# Altium PCB КПБТ.758724.006_v2.PcbDoc
Units mm, origin at the board's own origin, x right, y up, seen from the top; angles counter-clockwise.
Board outline 70 x 80 mm, 2 copper layers (Top Layer, Top, Bottom Layer, Bottom); 124 components, 71 nets, 354 pads, 52 vias.
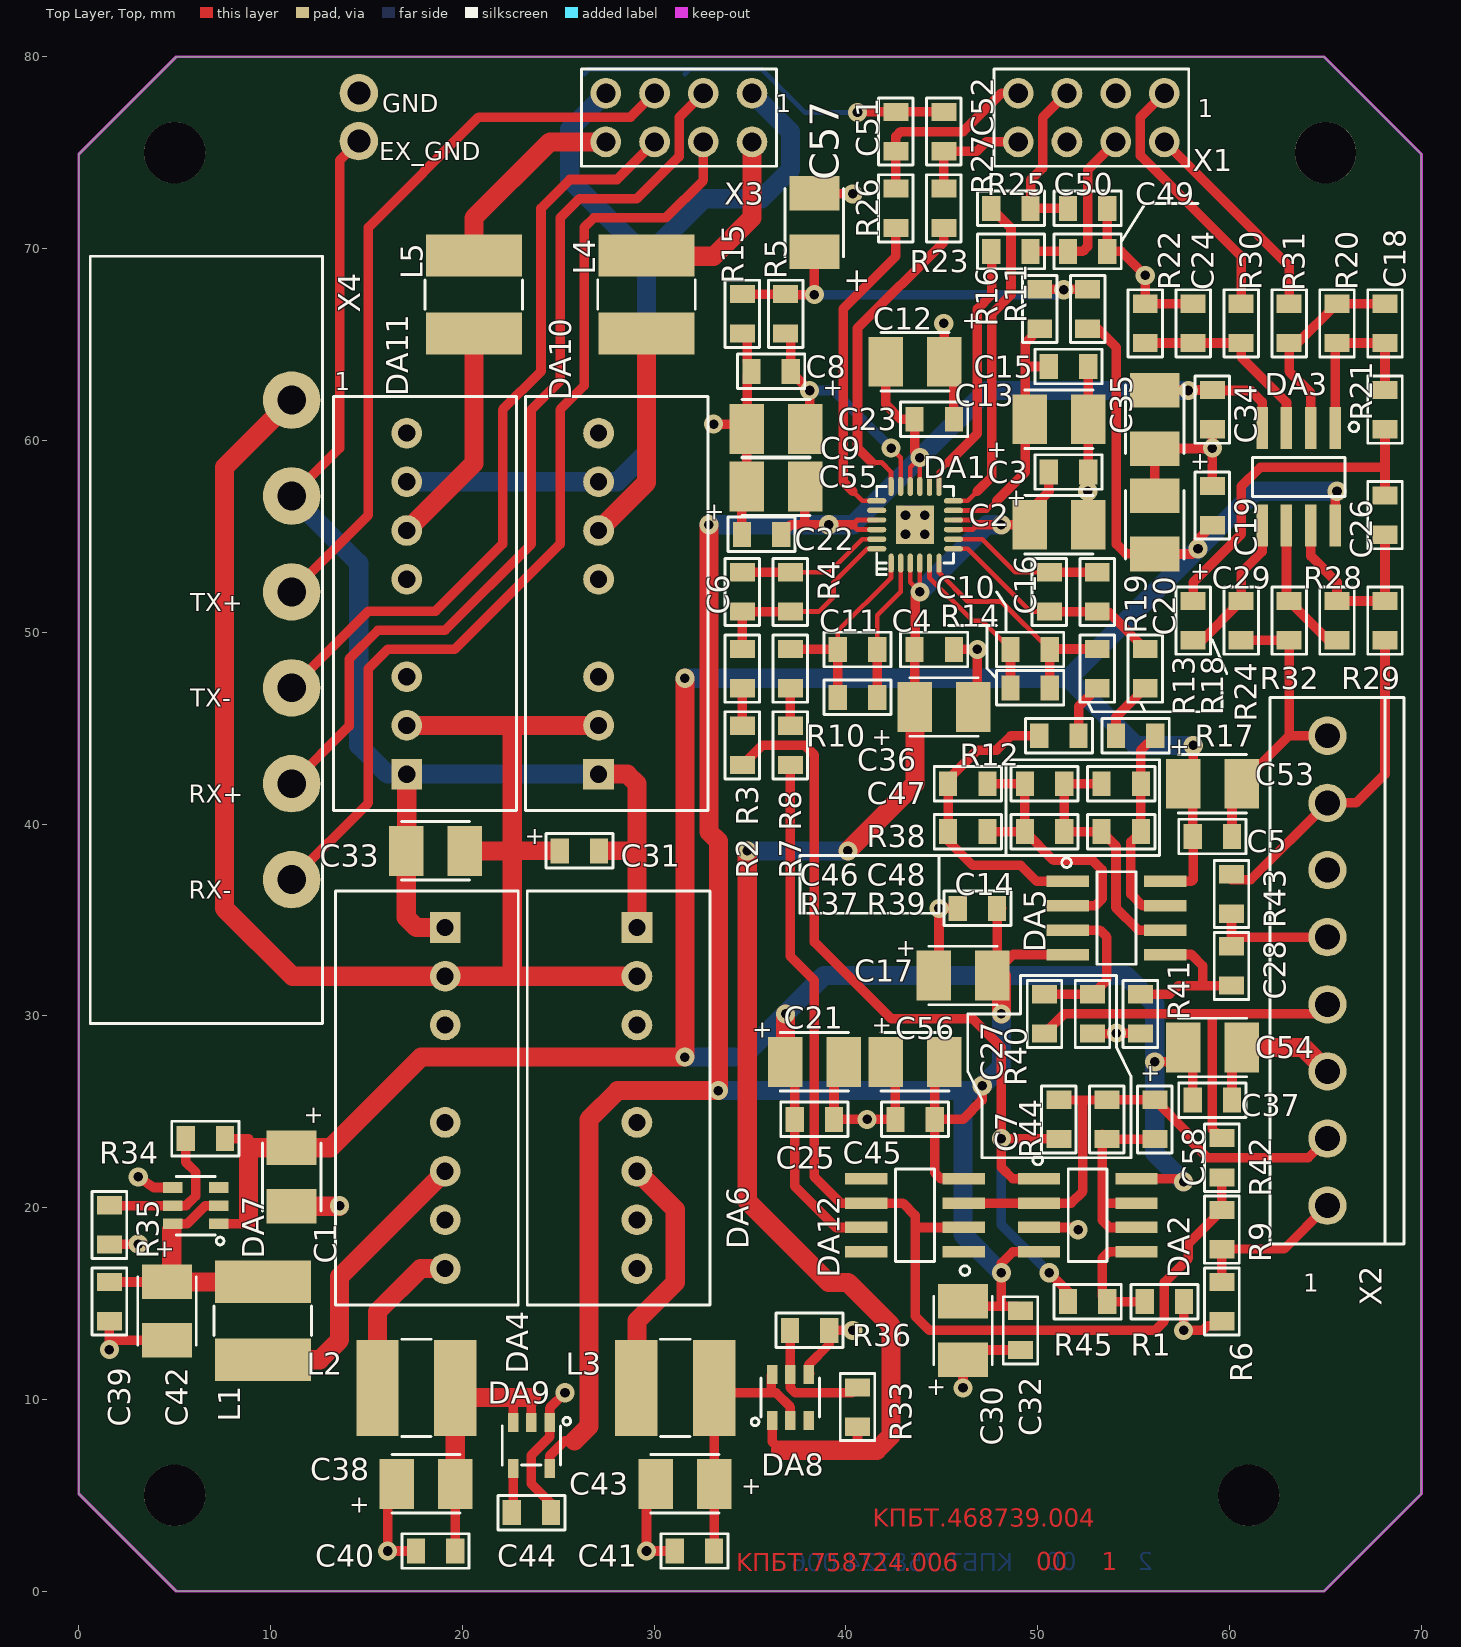
[diagram p0: Top Layer, Top view]
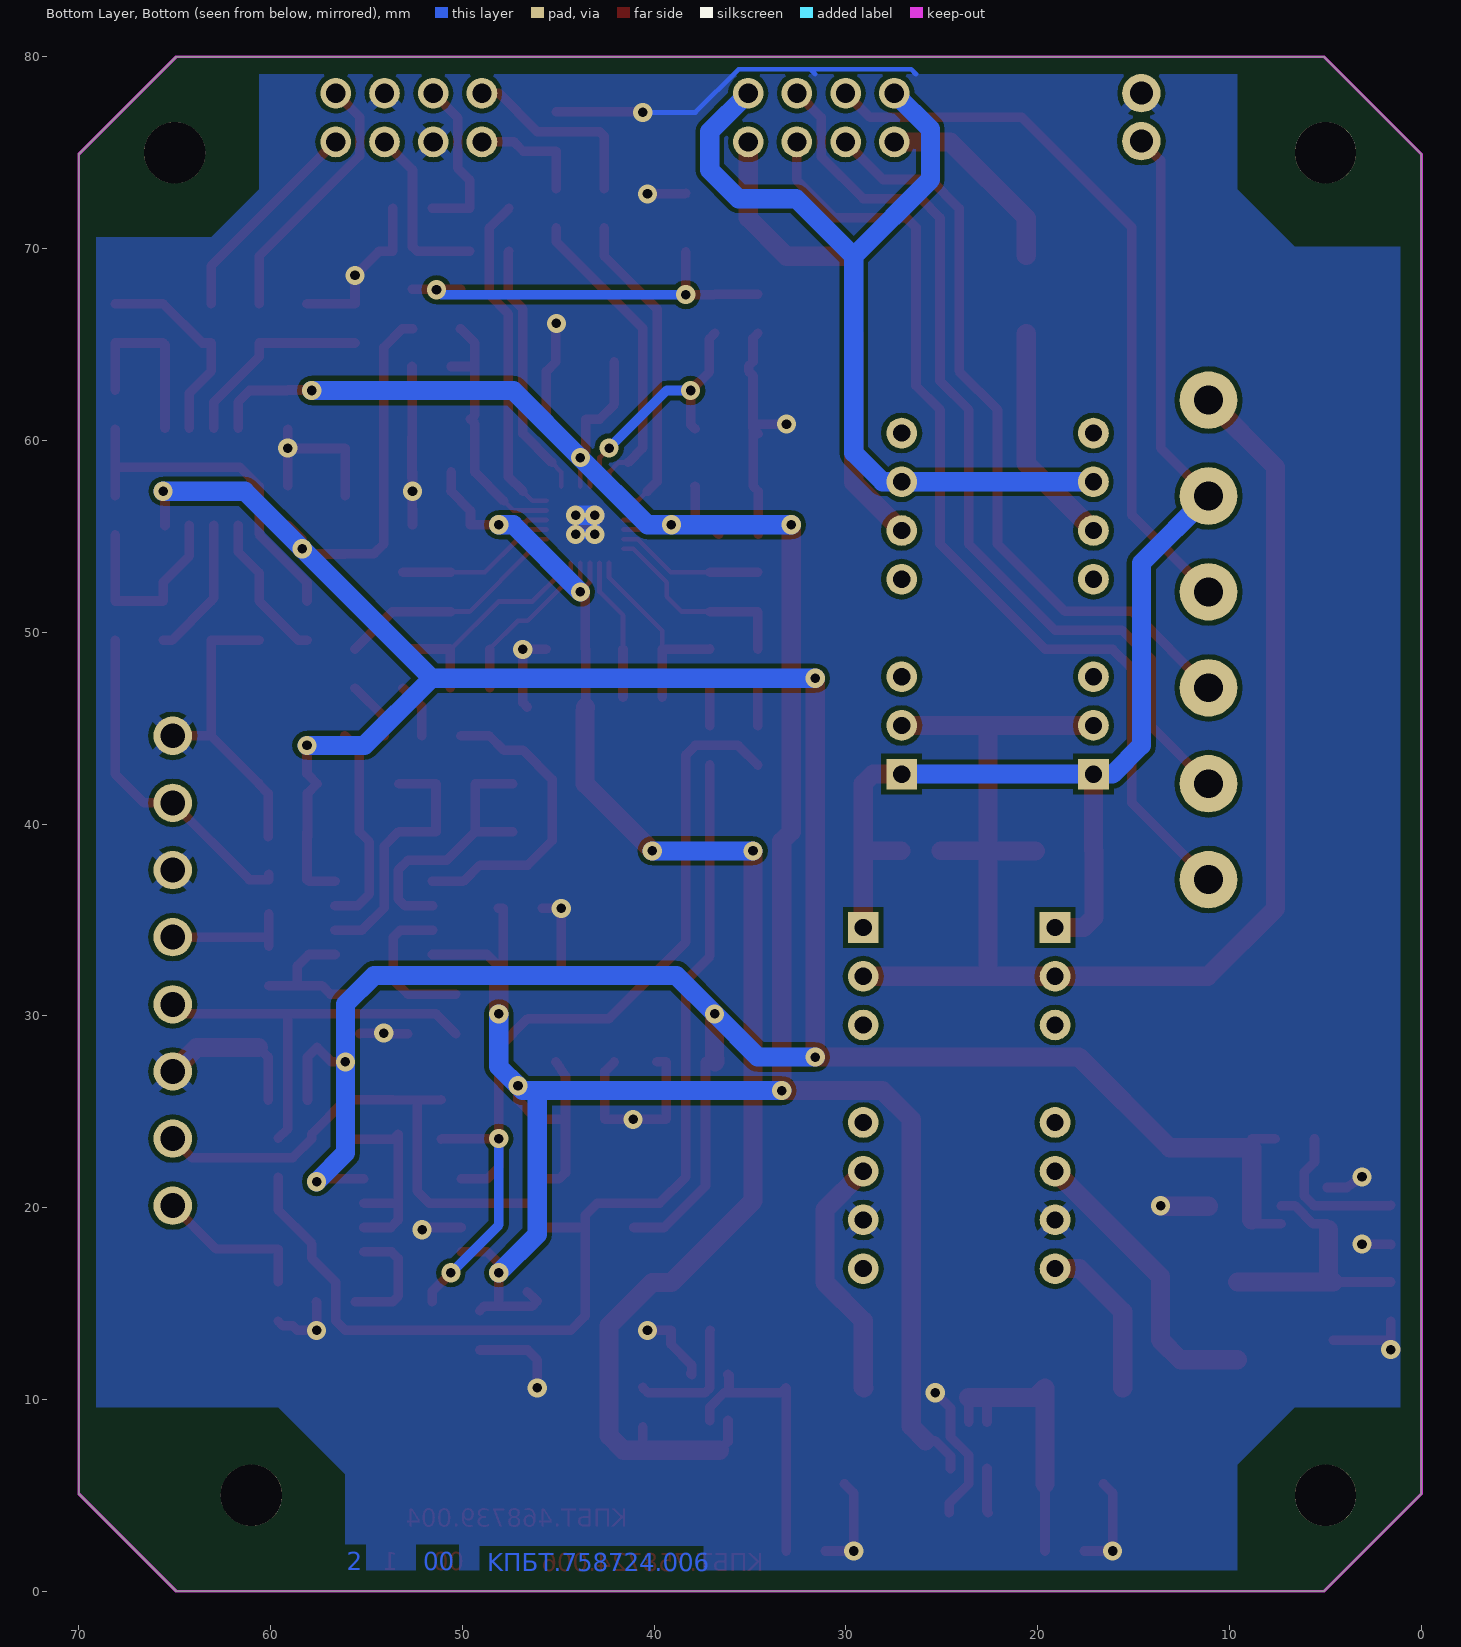
[diagram p1: Bottom Layer, Bottom view, seen from below]

## Layer stack, top to bottom
Top Solder, Top Mask: solder mask 0.0102, Solder Resist, Dk 3.5
Top Layer, Top: signal copper 0.0356
Dielectric 1: dielectric 0.32, FR-4, Dk 4.8
Bottom Layer, Bottom: signal copper 0.0356
Bottom Solder, Bot Mask: solder mask 0.0102, Solder Resist, Dk 3.5

## Board outline
0,74.92 0,5.08 5.08,0 64.92,0 70,5.08 70,74.92 64.92,80 5.08,80

## Design rules (kind name [scope] priority, off if disabled: settings)
Clearance [All] p1: gap=0.254 ignorepadtopadclearanceinfootprint=FALSE except(0: Arc-Hole Track-Hole SMDPad-Hole THPad-Hole Via-Hole Fill-Hole Poly-Hole Region-Hole Text-Hole; 0.2: Arc-Arc Arc-Track Arc-THPad Arc-Via Track-Track Track-THPad Track-Via THPad-THPad THPad-Via Via-Via)
PlaneClearance [All] p1: clearance=0.25
PolygonConnect PolygonConnect_2 [IsPolygon And InNet('GND') And OnLayer('Bottom Layer, Bottom') vs IsVia] p1: connectstyle=Direct reliefconductorwidth=0.25 reliefentries=4 polygonreliefangle="90 Angle" airgapwidth=0.254
PolygonConnect PolygonConnect_1 [IsPolygon And InNet('GND') And OnLayer('Bottom Layer, Bottom') vs IsPad] p2: connectstyle=Relief reliefconductorwidth=0.5 reliefentries=4 polygonreliefangle="45 Angle" airgapwidth=0.254
PolygonConnect [All] p3: connectstyle=Relief reliefconductorwidth=0.254 reliefentries=4 polygonreliefangle="90 Angle" airgapwidth=0.254
RoutingVias [All] p1: holewidth=0.711 width=1.27 viastyle="Through Hole" minholewidth=0.711 minwidth=1.27 maxholewidth=0.711 maxwidth=1.27
SolderMaskExpansion [All] p1: expansion=0.102 istentingtop=FALSE
Width [All] p1: maxlimit=0.254 minlimit=0.254 preferedwidth=0.254
29 further rules are at their usual default settings.

## Components (designator, comment, footprint, x,y, rotation, side; value= is the part's Value field where it differs from the comment)
C1 "" CASEB 11.1,21.6 r270 top
C2 "" CASEB 51.1,55.6 r0 top
C3 "" R0805 51.6,58.35 r0 top
C4 "" R0805 44.6,49.1 r0 top
C5 "" R0805 59.1,39.35 r0 top
C6 "" R0805 34.6,52.1 r90 top
C7 "" R0805 51.1,24.6 r270 top
C8 "" R0805 36.1,63.6 r180 top
C9 "" CASEB 36.35,60.6 r180 top
C10 "" R0805 49.6,49.1 r180 top
C11 "" R0805 40.6,49.1 r0 top
C12 "" CASEB 43.6,64.1 r180 top
C13 "" CASEB 51.1,61.1 r0 top
C14 "" R0805 46.85,35.6 r0 top
C15 "" R0805 51.6,63.85 r0 top
C16 "" R0805 50.6,52.1 r90 top
C17 "" CASEB 46.1,32.1 r0 top
C18 "" R0805 68.1,66.1 r270 top
C19 "" R0805 59.1,56.6 r90 top
C20 "" CASEB 56.1,55.6 r90 top
C21 "" CASEB 38.35,27.6 r0 top
C22 "" R0805 35.6,55.1 r0 top
C23 "" R0805 44.6,61.1 r180 top
C24 "" R0805 58.1,66.1 r270 top
C25 "" R0805 38.35,24.6 r0 top
C26 "" R0805 68.1,56.1 r270 top
C27 "" R0805 50.35,30.1 r90 top
C28 "" R0805 60.1,32.6 r270 top
C29 "" R0805 60.6,50.6 r90 top
C30 "" CASEB 46.1,13.6 r90 top
C31 "" R0805 26.1,38.6 r0 top
C32 "" R0805 49.1,13.6 r90 top
C33 "" CASEB 18.6,38.6 r180 top
C34 "" R0805 59.1,61.6 r90 top
C35 "" CASEB 56.1,61.1 r90 top
C36 "" CASEB 45.1,46.1 r0 top
C37 "" R0805 59.1,25.6 r0 top
C38 "" CASEB 18.1,5.6 r0 top
C39 "" R0805 1.6,15.1 r270 top
C40 "" R0805 18.6,2.1 r0 top
C41 "" R0805 32.1,2.1 r180 top
C42 "" CASEB 4.6,14.6 r270 top
C43 "" CASEB 31.6,5.6 r180 top
C44 "" R0805 23.6,4.1 r0 top
C45 "" R0805 43.6,24.6 r180 top
C46 "" R0805 50.35,42.1 r0 top
C47 "" R0805 46.35,42.1 r180 top
C48 "" R0805 54.35,42.1 r0 top
C49 "" R0805 52.6,69.85 r0 top
C50 "" R0805 52.6,72.1 r0 top
C51 "" R0805 42.6,76.1 r90 top
C52 "" R0805 45.1,76.1 r90 top
C53 "" CASEB 59.1,42.1 r0 top
C54 "" CASEB 59.1,28.35 r0 top
C55 "" CASEB 36.35,57.6 r0 top
C56 "" CASEB 43.6,27.6 r0 top
C57 "" CASEB 38.35,71.35 r90 top
C58 "" R0805 56.1,24.6 r270 top
DA1 "" ADA4940 43.6,55.6 r0 top
DA2 "" SO8 52.6,19.6 r270 top
DA3 "" SO8 63.6,58.1 r180 top
DA4 "" SIP8_SIP8(Primary) 19.1,34.6 r270 top
DA5 "" SO8 54.1,35.1 r270 top
DA6 "" SIP8_SIP8(Primary) 29.1,34.6 r270 top
DA7 "" ADP3330 6.1,20.1 r90 top
DA8 "" ADP3330 37.1,10.1 r0 top
DA9 "" SOT23-5 23.6,7.6 r180 top
DA10 "" SIP8_SIP8(Primary) 27.1,42.6 r90 top
DA11 "" SIP8_SIP8(Primary) 17.1,42.6 r90 top
DA12 "" SO8 43.6,19.6 r90 top
L1 "" C2220 9.6,14.1 r90 top
L2 "" C2220 17.6,10.6 r0 top
L3 "" C2220 31.1,10.6 r0 top
L4 "" C2220 29.6,67.6 r90 top
L5 "" C2220 20.6,67.6 r90 top
R1 "" R0805 56.6,15.1 r0 top
R2 "" R0805 34.6,44.1 r90 top
R3 "" R0805 34.6,48.1 r90 top
R4 "" R0805 37.1,52.1 r90 top
R5 "" R0805 36.85,66.6 r270 top
R6 "" R0805 59.6,15.1 r270 top
R7 "" R0805 37.1,44.1 r90 top
R8 "" R0805 37.1,48.1 r90 top
R9 "" R0805 59.6,18.85 r90 top
R10 "" R0805 40.6,46.6 r0 top
R11 "" R0805 52.6,66.85 r90 top
R12 "" R0805 51.1,44.6 r0 top
R13 "" R0805 53.1,48.1 r90 top
R14 "" R0805 49.6,47.1 r180 top
R15 "" R0805 34.6,66.6 r90 top
R16 "" R0805 50.1,66.85 r270 top
R17 "" R0805 55.1,44.6 r180 top
R18 "" R0805 55.6,48.1 r90 top
R19 "" R0805 53.1,52.1 r90 top
R20 "" R0805 65.6,66.1 r270 top
R21 "" R0805 68.1,61.6 r90 top
R22 "" R0805 55.6,66.1 r270 top
R23 "" R0805 48.6,69.85 r0 top
R24 "" R0805 58.1,50.6 r270 top
R25 "" R0805 48.6,72.1 r0 top
R26 "" R0805 42.6,72.1 r90 top
R27 "" R0805 45.1,72.1 r90 top
R28 "" R0805 65.6,50.6 r270 top
R29 "" R0805 68.1,50.6 r270 top
R30 "" R0805 60.6,66.1 r90 top
R31 "" R0805 63.1,66.1 r90 top
R32 "" R0805 63.1,50.6 r90 top
R33 "" R0805 40.6,9.6 r270 top
R34 "" R0805 6.6,23.6 r0 top
R35 "" R0805 1.6,19.1 r270 top
R36 "" R0805 38.1,13.6 r0 top
R37 "" R0805 50.35,39.6 r0 top
R38 "" R0805 46.35,39.6 r180 top
R39 "" R0805 54.35,39.6 r0 top
R40 "" R0805 52.85,30.1 r90 top
R41 "" R0805 55.35,30.1 r90 top
R42 "" R0805 59.6,22.6 r90 top
R43 "" R0805 60.1,36.35 r90 top
R44 "" R0805 53.6,24.6 r270 top
R45 "" R0805 52.6,15.1 r0 top
X1 "" PLD8 56.6,78.1 r0 top
X2 "" 15EDGVC 65.1,20.1 r90 top
X3 "" PLD8 35.1,78.1 r0 top
X4 "" 2EDGRM 11.1,62.1 r270 top

## Footprints (in the part's own frame and the unit in brackets; to place one, negate y for a bottom-side part, rotate by r counter-clockwise, add the part's x,y. Pads: shape width x height; smd on the part's side, far side on the other; paste and mask are expansions set on the pad)
2EDGRM [mm]
  round 3 hole 1.5: 1(0,0) 2(5,0) 3(10,0) 4(15,0) 5(20,0) 6(25,0)
  silkscreen extent -7.5,-10.5 32.5,1.6
15EDGVC [mm]
  round 2 hole 1.3: 1(0,0) 2(3.5,0) 3(7,0) 4(10.5,0) 5(14,0) 6(17.5,0) 7(21,0) 8(24.5,0)
  silkscreen extent -2,-4 26.5,3
ADA4940 [mm]
  oval 0.28x1 smd: 1(-1.25,-2) 2(-0.75,-2) 3(-0.25,-2) 4(0.25,-2) 5(0.75,-2) 6(1.25,-2) 13(1.25,2) 14(0.75,2) 15(0.25,2) 16(-0.25,2) 17(-0.75,2) 18(-1.25,2)
  oval 1x0.28 smd: 7(2,-1.25) 8(2,-0.75) 9(2,-0.25) 10(2,0.25) 11(2,0.75) 12(2,1.25) 19(-2,1.25) 20(-2,0.75) 21(-2,0.25) 22(-2,-0.25) 23(-2,-0.75) 24(-2,-1.25)
  rect 2x2 smd: 25(0,0)
  silkscreen extent -2,-2.6 2,2
ADP3330 [mm]
  rect 0.55x1 smd: 1(-0.95,-1.2) 2(0,-1.2) 3(0.95,-1.2) 4(0.95,1.2) 5(0,1.2) 6(-0.95,1.2)
  silkscreen extent -2.04,-1.47 1.52,1.02
C2220 [mm]
  rect 2.2x5 smd: 1(-2.032,0) 2(2.032,0)
  silkscreen extent -0.76,-2.54 0.76,2.54
CASEB [mm]
  rect 1.8x2.6 smd: 1(-1.524,0) 2(1.524,0)
  silkscreen extent -1.78,-1.52 1.78,1.52
PLD8 [mm]
  round 1.6 hole 1: 1(0,0) 2(0,-2.54) 3(-2.54,0) 4(-2.54,-2.54) 5(-5.08,0) 6(-5.08,-2.54) 7(-7.62,0) 8(-7.62,-2.54)
  silkscreen extent -8.89,-3.81 1.27,1.27
R0805 [mm]
  rect 0.95x1.3 smd: 1(-1.025,0) 2(1.025,0)
  silkscreen extent -1.75,-0.9 1.75,0.9
SIP8_SIP8(Primary) [mm]
  rect 1.6x1.6 hole 0.9: 1(0,0)
  round 1.6 hole 0.9: 2(2.54,0) 3(5.08,0) 5(10.16,0) 6(12.7,0) 7(15.24,0) 8(17.78,0)
  silkscreen extent -1.91,-5.71 19.68,3.81
SO8 [mm]
  rect 0.6x2.2 smd: 1(-1.905,-2.54) 2(-0.635,-2.54) 3(0.635,-2.54) 4(1.905,-2.54) 5(1.905,2.54) 6(0.635,2.54) 7(-0.635,2.54) 8(-1.905,2.54)
  silkscreen extent -3.13,-2.85 2.41,1.02
SOT23-5 [mm]
  rect 0.55x1 smd: 1(-0.95,-1.2) 2(0,-1.2) 3(0.95,-1.2) 4(0.95,1.2) 5(-0.95,1.2)
  silkscreen extent -2.04,-1.47 1.52,1.02

## Free pads (board coordinates)
  round 2 hole 1.2: 0(14.6,75.6) 0(14.6,78.1)
  round 3.2 hole 3.2 unplated: 6(5,5) 6(5,75) 6(61,5) 6(65,75)

## Via types
v1: diameter 1, hole 0.5, Top Layer, Top to Bottom Layer, Bottom, 52 vias

## Nets (pads, with @x,y where several pads share a name; then routed paths per layer and width w, separated by ;. In a path a pad name is that pad's centre, name@x,y a point inside that pad or via, vN(x,y) a via of type N, cw(c..) or ccw(c..) an arc to the next point about the centre after c; other vN are vias at no path point)
+2.5V: C1.1 C5.1 C19.1 C20.1 C21.1 C25.1 C37.1 C53.1 C54.1 DA2.8 DA3.8 DA5.8 DA7.1 DA12.7 R11.1 R34.2 | length 185.4
  Top Layer, Top w0.5: DA7.1 8.65,19.15 8.85,19.35 ; R34.2 8.85,23.6 8.85,23.1 8.874,23.124 ; v1@31.6,27.6 v1(31.6,27.85) ; C21.1 37.325,27.601 C25.1 37.325,21.125 39.485,18.965 DA12.7 ; R11.1 53.125,65.825 54.1,64.85 54.1,54.6 54.6,54.1 56.076,54.1 C20.1 58.076,54.076 v1(58.35,54.35) 58.35,54.825 C19.1 ; DA2.8 57.445,21.505 v1(57.6,21.35) ; v1(56.1,27.6) 56.826,27.6 C54.1 58.075,27.851 C37.1 ; DA5.8 58.005,37.005 58.1,37.1 58.1,39.575 C5.1 58.075,41.601 C53.1 58.1,42.624 v1(58.1,44.1) ; DA3.8 65.505,57.255 v1(65.6,57.35)
  Top Layer, Top w1: 8.85,19.35 8.85,23.1 ; 8.874,23.124 C1.1 13.124,23.124 17.85,27.85 v1(31.6,27.85) v1(31.6,47.6) ; C21.1 36.85,28.124 v1(36.85,30.1)
  Bottom Layer, Bottom w1: v1(31.6,27.85) 34.6,27.85 v1(36.85,30.1) 38.85,32.1 54.6,32.1 56.1,30.6 v1(56.1,27.6) 56.1,22.85 v1(57.6,21.35) ; v1(31.6,47.6) 51.6,47.6 ; v1(58.1,44.1) 55.1,44.1 51.6,47.6 ; v1(65.6,57.35) 61.35,57.35 v1(58.35,54.35) 51.6,47.6
+3.3V: C39.1 C42.1 DA7.2 DA7.6 L1.2 | length 14.4
  Top Layer, Top w0.5: C39.1 C39.1 C42.1 4.9,16.424 C42.1@4.85,16.374 ; 4.85,18.85 4.85,19.1 DA7.6 5.65,19.15 6.6,20.1 DA7.2 ; L1.2@9.592,16.124 L1.2
  Top Layer, Top w1: 4.85,18.85 4.85,16.374 C42.1 L1.2@9.592,16.124
+3.3V_D: L4.2 X3.2 | length 10.3
  Top Layer, Top w1: L4.2 29.632,69.6 33.1,69.6 35.1,71.6 X3.2
+4.5V: C2.1 C3.1 C4.1 C36.1 DA1.3 DA1.4 DA1.9 DA1.10 DA8.1 R33.2 | length 81.1
  Top Layer, Top w0.25: DA1.3 43.35,52.6 v1(43.85,52.1) DA1.4 ; DA1.9 46.6,55.35 46.85,55.6 46.6,55.85 DA1.10
  Top Layer, Top w0.5: DA8.1 36.15,7.8 36.6,7.35 ; 40.6,7.35 R33.2 ; C36.1 43.576,49.099 C4.1 43.6,49.125 43.6,51.85 v1(43.85,52.1) ; 46.85,55.6 v1(48.1,55.6) C2.1 49.576,56.326 50.6,57.35 50.575,57.375 C3.1
  Top Layer, Top w1: v1(34.85,38.6) 34.85,20.35 39.1,16.1 40.1,16.1 42.35,13.85 42.35,8.1 41.6,7.35 40.6,7.35 36.6,7.35 ; v1(40.1,38.6) 43.6,42.1 43.6,45.85 C36.1
  Bottom Layer, Bottom w1: v1(34.85,38.6) v1(40.1,38.6) ; v1(43.85,52.1) 47.35,55.6 v1(48.1,55.6)
+5V: C41.1 C43.1 DA8.2 DA8.6 L3.2 | length 14.6
  Top Layer, Top w0.5: C41.1 C41.1 C43.1 33.124,10.592 L3.2 33.382,10.35 36.1,10.35 ; DA8.6 36.1,11.25 36.1,10.35 ; DA8.2 37.1,9.6 36.35,10.35 36.1,10.35
+5V_D: L5.2 X3.8 | length 10.5
  Top Layer, Top w1: L5.2 20.6,71.6 24.56,75.56 X3.8
+12V_EXA: C31.1 C33.1 DA4.2 DA6.2 DA10.2 DA11.2 X4.1 | length 78.9
  Top Layer, Top w0.95: 22.6,38.6 C31.1
  Top Layer, Top w1: X4.1 7.6,58.6 7.6,35.6 11.14,32.06 DA4.2 22.6,32.06 ; DA11.2 22.6,45.14 ; C33.1 22.6,38.6 ; DA10.2 22.6,45.14 ; DA6.2 22.6,32.06 ; 22.6,32.06 22.6,38.6 ; 22.6,38.6 22.6,45.14
-2.5V: C12.2 C14.2 C17.2 C22.2 C23.2 C30.2 C32.2 C34.2 C35.2 C45.1 C55.2 C56.2 DA1.15 DA1.16 DA1.21 DA1.22 DA2.4 DA3.4 DA5.4 DA9.5 DA12.4 | length 168.2
  Top Layer, Top w0.25: DA1.22 40.6,55.35 40.35,55.6 40.6,55.85 DA1.21 ; DA1.16 43.35,58.6 v1(43.85,59.1) DA1.15
  Top Layer, Top w0.5: DA9.5 24.55,7.05 25.35,7.85 25.85,7.85 ; C22.2 37.125,55.6 37.85,55.6 ; C55.2 37.85,57.576 37.85,55.6 ; 40.35,55.6 v1(39.1,55.6) 37.85,55.6 ; C12.2 42.076,61.874 42.85,61.1 C23.2 43.575,59.375 v1(43.85,59.1) ; C56.2 44.625,26.851 C45.1 ; DA12.4 44.945,21.505 44.625,21.825 C45.1 ; C30.2@46.624,15.624 C30.2 46.374,14.85 48.1,14.85 ; v1(47.1,26.35) 47.1,25.6 46.1,24.6 C45.1 ; C14.2@48.124,35.599 C14.2 47.875,32.351 C17.2 48.719,33.195 DA5.4 ; C32.2 48.875,14.85 48.1,14.85 ; DA2.4 48.695,17.695 48.1,17.1 v1(48.1,16.6) 48.1,14.85 ; C35.2 56.101,62.625 v1@57.85,62.625 ; v1(57.85,62.6) v1@57.85,62.625 ; DA3.4 61.695,62.005 61.1,62.6 59.125,62.6 C34.2 v1@57.85,62.625
  Top Layer, Top w1: 25.85,7.85 26.6,8.6 26.6,24.6 28.1,26.1 v1(33.35,26.1) 33.35,39.1 32.85,39.6 v1(32.85,55.6) ; C17.2 48.1,32.076 v1(48.1,30.1)
  Bottom Layer, Bottom w1: v1(32.85,55.6) v1(39.1,55.6) 40.35,55.6 v1(43.85,59.1) 47.35,62.6 v1(57.85,62.6) ; v1(33.35,26.1) 46.1,26.1 ; v1(48.1,16.6) 46.1,18.6 46.1,26.1 ; v1(48.1,30.1) 48.1,27.35 v1(47.1,26.35) 46.85,26.1 46.1,26.1
-3.3V: C38.2 C40.2 DA9.2 DA9.3 L2.2 | length 15.3
  Top Layer, Top w0.5: C38.2 C40.2 C40.2 ; L2.2@19.624,10.592 L2.2 ; 22.6,10.1 22.65,10.05 DA9.3 ; DA9.2 23.6,10.1
  Top Layer, Top w1: C38.2 L2.2@19.624,10.592 ; L2.2 20.132,10.1 22.6,10.1 23.6,10.1
C441: C44.1 DA9.4 | length 2.3
  Top Layer, Top w0.5: C44.1 22.65,4.175 DA9.4
DA11: C11.1 DA1.1 R8.2 R10.1 | length 10.6
  Top Layer, Top w0.25: C11.1 39.575,50.075 42.35,52.85 DA1.1
  Top Layer, Top w0.5: R8.2 37.125,49.1 C11.1 R10.1
DA12: C11.2 DA1.2 R10.2 | length 7.5
  Top Layer, Top w0.25: C11.2 41.625,50.875 42.85,52.1 DA1.2
  Top Layer, Top w0.5: R10.2 C11.2
DA15: C10.2 DA1.5 R14.2 | length 8.5
  Top Layer, Top w0.25: DA1.5 44.35,52.85 46.6,50.6 47.1,50.6 48.575,49.125 C10.2
  Top Layer, Top w0.5: R14.2 C10.2
DA16: C10.1 DA1.6 R13.2 R14.1 | length 12.4
  Top Layer, Top w0.25: DA1.6 44.85,53.1 46.35,51.6 48.1,51.6 50.6,49.1 C10.1
  Top Layer, Top w0.5: R14.1 C10.1 50.65,49.125 R13.2
DA17: C16.1 DA1.7 R18.2 R19.1 | length 12.2
  Top Layer, Top w0.25: DA1.7 46.35,54.35 49.625,51.075 C16.1
  Top Layer, Top w0.5: C16.1 R19.1 53.65,51.075 R18.2
DA18: C16.2 DA1.8 R19.2 | length 8.2
  Top Layer, Top w0.25: DA1.8 47.1,54.85 48.825,53.125 C16.2
  Top Layer, Top w0.5: C16.2 R19.2
DA21: C7.2 DA2.1 R2.1 R45.1 | length 47.6
  Top Layer, Top w0.5: R2.1 35.625,44.1 37.85,44.1 38.35,43.6 38.35,33.85 42.35,29.85 46.6,29.85 48.1,28.35 v1(48.1,23.6) ; DA2.1 48.695,21.505 48.1,22.1 v1(48.1,23.6) ; v1(50.6,16.6) 51.575,15.625 R45.1 ; C7.2 51.075,23.6 v1(48.1,23.6)
  Bottom Layer, Bottom w0.5: v1(48.1,23.6) 48.1,19.1 v1(50.6,16.6)
DA25: DA2.5 R1.1 R45.2 | length 6.2
  Top Layer, Top w0.5: DA2.5 53.695,17.695 53.35,17.35 53.35,15.375 R45.2 R1.1
DA27: C58.2 DA2.6 DA2.7 R44.2 | length 11.1
  Top Layer, Top w0.5: DA2.6 53.735,18.965 53.35,19.35 53.35,20.35 ; DA2.7 53.465,20.235 53.35,20.35 ; C58.2 R44.2 53.35,23.825 53.35,20.35
DA31: C18.2 DA3.1 R20.2 R21.2 | length 9.4
  Top Layer, Top w0.5: DA3.1 65.505,64.98 R20.2 C18.2 R21.2
DA32: C18.1 DA3.2 R20.1 R31.1 | length 10.8
  Top Layer, Top w0.5: DA3.2 64.235,62.465 63.1,63.6 R31.1 63.55,65.075 R20.1 C18.1
DA33: C24.2 DA3.3 R22.2 R30.1 | length 10.4
  Top Layer, Top w0.5: R22.2 C24.2 R30.1 60.6,64.35 62.965,61.985 DA3.3
DA35: C29.2 DA3.5 R24.2 | length 7.7
  Top Layer, Top w0.5: R24.2 58.55,49.575 C29.2 60.6,53.1 61.695,54.195 DA3.5
DA36: DA3.6 R28.2 R32.2 | length 7.3
  Top Layer, Top w0.5: DA3.6 62.965,51.76 R32.2 65.15,49.575 R28.2
DA37: C26.2 DA3.7 R28.1 R29.1 | length 10.5
  Top Layer, Top w0.5: DA3.7 64.235,53.965 65.6,52.6 R28.1 R29.1 C26.2
DA51: C47.2 DA5.1 R12.1 R38.2 | length 16
  Top Layer, Top w0.5: R12.1 48.6,44.6 47.85,43.85 46.85,43.85 45.325,42.325 C47.2 R38.2 45.325,39.125 46.6,37.85 49.1,37.85 49.945,37.005 DA5.1
DA52: C46.1 C47.1 DA5.2 R37.1 R38.1 | length 14.7
  Top Layer, Top w0.5: R38.1 R37.1 ; C47.1 C46.1 R37.1 ; DA5.2 52.985,35.735 53.35,36.1 53.35,37.6 52.85,38.1 50.825,38.1 R37.1
DA53: C27.2 DA5.3 R40.2 | length 8
  Top Layer, Top w0.5: C27.2 R40.2 53.6,31.875 53.6,34.1 53.235,34.465 DA5.3
DA55: C28.2 DA5.5 R41.2 | length 8.2
  Top Layer, Top w0.5: R41.2 56.875,31.125 57.325,31.575 58.625,31.575 ; DA5.5 58.005,33.195 58.6,32.6 58.6,31.6 58.625,31.575 ; C28.2 58.625,31.575
DA56: C46.2 C48.1 DA5.6 R37.2 R39.1 | length 13.7
  Top Layer, Top w0.5: C48.1 C46.2 R37.2 R39.1 54.075,38.85 54.075,35.625 55.235,34.465 DA5.6
DA57: C48.2 DA5.7 R17.1 R39.2 | length 10.8
  Top Layer, Top w0.5: R17.1 55.375,43.85 C48.2 R39.2 54.85,39.075 54.85,36.35 55.465,35.735 DA5.7
DA111: C13.1 C15.1 DA1.11 R16.2 | length 13.8
  Top Layer, Top w0.25: DA1.11 47.35,56.35 47.85,56.85
  Top Layer, Top w0.5: 47.85,56.85 49.35,58.35 49.35,60.874 C13.1 49.35,61.326 49.35,63.85 ; R16.2 49.35,65.075 49.35,63.85 ; C15.1 49.35,63.85
DA117: C8.1 C9.1 DA1.17 R5.2 | length 13.3
  Top Layer, Top w0.25: v1(42.35,59.6) 42.85,59.1 DA1.17
  Top Layer, Top w0.5: R5.2 37.125,65.3 C8.1 37.125,63.575 v1(38.1,62.6) 38.1,60.826 C9.1
  Bottom Layer, Bottom w0.5: v1(38.1,62.6) 39.35,62.6 v1(42.35,59.6)
DA122: DA12.2 DA12.6 R7.1 R9.2 R42.1 | length 58.2
  Top Layer, Top w0.5: R7.1 37.1,33.1 38.35,31.85 38.35,21.6 39.715,20.235 DA12.6 42.965,20.235 43.6,19.6 43.6,19.1 ; DA12.2 43.735,18.965 43.6,19.1 ; R42.1 R9.2 57.85,18.125 57.85,17.35 56.6,16.1 56.6,14.1 56.1,13.6 44.35,13.6 43.6,14.35 43.6,19.1
DA123: C6.2 DA1.23 R4.2 | length 7.7
  Top Layer, Top w0.25: R4.2 39.125,53.125 40.85,54.85 DA1.23
  Top Layer, Top w0.5: C6.2 R4.2
DA124: C6.1 DA1.24 R3.2 R4.1 | length 10.7
  Top Layer, Top w0.25: R4.1 38.575,51.075 39.35,51.85 39.35,52.6 41.1,54.35 DA1.24
  Top Layer, Top w0.5: R3.2 C6.1 R4.1
DA351: C26.1 R21.1 R24.1 | length 18.4
  Top Layer, Top w0.5: R24.1 58.1,52.6 60.6,55.1 60.6,57.6 61.6,58.6 68.1,58.6 ; C26.1 68.1,58.6 ; R21.1 68.1,58.6
EX_GND: C31.2 C33.2 DA4.1 DA6.1 DA10.1 DA11.1 pad.0@14.6,75.6 X4.2 | length 68.9
  Top Layer, Top w0.5: X4.2 13.6,59.6 13.6,74.6 pad.0@14.6,75.6
  Top Layer, Top w0.95: C31.2 29.1,38.6
  Top Layer, Top w1: DA11.1 17.1,38.624 C33.2 17.076,35.124 17.6,34.6 DA4.1 ; DA10.1 28.6,42.6 29.1,42.1 29.1,38.6 DA6.1
  Bottom Layer, Bottom w1: X4.2 14.6,53.6 14.6,44.1 16.1,42.6 DA11.1 DA10.1
GEN+: R30.2 X1.1 | length 13.7
  Top Layer, Top w0.5: X1.1 55.35,76.85 55.35,74.85 60.6,69.6 R30.2
GEN-: R31.2 X1.2 | length 11.2
  Top Layer, Top w0.5: X1.2 56.64,75.56 63.1,69.1 R31.2
GND: C1.2 C2.2 C3.2 C4.2 C5.2 C8.2 C9.2 C12.1 C13.2 C14.1 C15.2 C17.1 C19.2 C20.2 C21.2 C22.1 C23.1 C24.1 C25.2 C29.1 C30.1 C32.1 C34.1 C35.1 C36.2 C37.2 C38.1 C39.2 C40.1 C41.2 C42.2 C43.2 C44.2 C45.2 C49.2 C50.2 C51.2 C52.2 C53.2 C54.2 C55.1 C56.1 C57.2 DA1.25 DA2.3 DA4.7 DA6.7 DA7.4 DA8.4 DA9.1 pad.0@14.6,78.1 R1.2 R6.2 R15.1 R22.1 R32.1 R35.2 R36.2 R40.1 R41.1 X1.3 X1.6 X2.3 X2.6 X2.8 | length 162.6
  Top Layer, Top w0.5: C39.2 v1(1.6,12.6) 1.826,13.076 C42.2 ; R35.2 1.625,18.1 v1(3.1,18.1) ; v1(3.1,21.6) 3.9,21.05 DA7.4 ; v1@13.576,20.076 v1(13.6,20.1) ; C38.1 16.1,5.124 v1(16.1,2.1) C40.1 ; C44.2 24.625,4.575 23.6,5.6 23.6,7.1 24.55,8.05 DA9.1 24.55,9.55 v1(25.35,10.35) ; C43.2 29.6,5.124 v1(29.6,2.1) C41.2 ; v1(33.1,60.85) 34.576,60.85 C9.2 ; C22.1 34.575,57.349 C55.1 C9.2 ; C9.2@34.575,60.349 C9.2 ; R15.1 34.85,65.325 34.85,64.1 35.075,63.875 C8.2 34.85,63.375 34.85,60.624 C9.2 ; DA8.4@38.1,11.35 DA8.4 38.05,11.8 39.125,12.875 R36.2 v1(40.35,13.6) ; C57.2 38.374,72.85 v1(40.35,72.85) ; C21.2 39.375,27.601 C25.2 v1(41.1,24.6) C45.2 42.575,27.101 C56.1 ; v1(40.6,77.1) 40.625,77.125 C51.2 C52.2 ; v1(43.1,55.1) v1(43.1,56.1) v1(44.1,56.1) ; C17.1 44.85,32.326 v1(44.85,35.6) C14.1 ; v1(45.1,66.1) 45.124,66.076 C12.1 45.625,63.599 C23.1 ; C4.2 v1(46.85,49.1) 46.85,46.326 C36.2 ; v1(46.1,10.6) C30.1 46.599,12.575 C32.1 ; DA2.3 51.985,18.965 v1(52.1,18.85) ; C3.2 52.6,58.325 v1(52.6,57.35) ; C15.2 52.624,61.599 C13.2 52.625,59.35 52.625,58.599 v1@52.615,57.35 ; R40.1 54.075,29.075 v1(54.1,29.1) 55.325,29.1 R41.1 ; C50.2 C49.2 54.35,69.85 v1(55.6,68.6) R22.1 C24.1 ; C20.2 C35.1 59.076,59.576 v1(59.1,59.6) ; R1.2 57.6,15.075 v1(57.6,13.6) 58.6,13.6 58.85,13.85 59.375,13.85 R6.2 ; C19.2 v1(59.1,59.6) ; C34.1 v1(59.1,59.6) ; C37.2 60.125,27.851 C54.2 ; C5.2 60.125,41.601 C53.2 60.624,42.124 63.1,44.6 ; C29.1 R32.1 63.1,44.6 ; X2.8 63.1,44.6 ; v1(52.6,57.35) 52.624,57.326 C2.2 52.6,55.6 v1@52.615,57.35 ; v1(52.6,57.35) v1@52.615,57.35
  Top Layer, Top w1: C1.2 v1@13.576,20.076 ; DA1.25 v1(44.1,55.1) ; C54.2 63.85,28.35 X2.3
  Bottom Layer, Bottom w0.25: 26.35,79.1 26.6,79.35 31.85,79.35 ; 31.6,79.1 31.85,79.35 ; v1(40.6,77.1) 37.85,77.1 35.6,79.35 31.85,79.35
  Bottom Layer, Bottom w0.5: v1(43.1,56.1) v1(43.1,55.1) v1(44.1,55.1) ; v1@43.85,56.1 v1(44.1,56.1)
  Bottom Layer, Bottom w1: v1(43.1,56.1) v1@43.85,56.1
GND_D: DA10.7 DA11.7 X3.1 X3.7 | length 48.5
  Bottom Layer, Bottom w1: DA11.7 DA10.7 28.09,57.84 29.6,59.35 29.6,69.6 ; X3.7 25.6,76.22 25.6,73.6 29.6,69.6 ; X3.1 37.1,76.1 37.1,74.1 35.6,72.6 32.6,72.6 29.6,69.6
I+: C51.1 R26.2 X1.7 | length 10
  Top Layer, Top w0.5: R26.2 C51.1 42.6,75.85 42.85,76.1 46.1,76.1 48.1,78.1 X1.7
I-: C52.1 R27.2 X1.8 | length 6
  Top Layer, Top w0.5: R27.2 C52.1 46.825,75.075 47.31,75.56 X1.8
IM+: DA1.19 R26.1 | length 16.5
  Top Layer, Top w0.25: 40.35,57.35 40.85,56.85 DA1.19
  Top Layer, Top w0.5: 40.35,57.35 39.85,57.85 39.85,66.85 42.6,69.6 R26.1
IM-: DA1.18 R27.1 | length 16.4
  Top Layer, Top w0.25: 41.35,58.85 41.85,58.85 42.35,58.35 DA1.18
  Top Layer, Top w0.5: 41.35,58.85 40.6,59.6 40.6,65.85 45.1,70.35 R27.1
L11: DA4.6 L1.1 | length 15.5
  Top Layer, Top w1: L1.1 12.568,12.068 13.6,13.1 13.6,16.4 DA4.6
L21: DA4.8 L2.1 | length 8.4
  Top Layer, Top w1: L2.1 15.568,14.568 17.82,16.82 DA4.8
L31: DA6.6 L3.1 | length 13
  Top Layer, Top w1: L3.1 29.1,10.632 29.1,14.1 31.1,16.1 31.1,19.9 DA6.6
L41: DA10.6 L4.1 | length 11.3
  Top Layer, Top w1: DA10.6 29.6,57.8 L4.1
L51: DA11.6 L5.1 | length 11.7
  Top Layer, Top w1: DA11.6 20.6,58.8 L5.1
R22: R2.2 R3.1 | length 2
  Top Layer, Top w0.5: R2.2 R3.1
R72: R7.2 R8.1 | length 2
  Top Layer, Top w0.5: R7.2 R8.1
R112: C57.1 R5.1 R11.2 R15.2 R16.1 | length 21.6
  Top Layer, Top w0.5: R15.2 R5.1 36.875,67.6 v1(38.35,67.6) C57.1 ; R16.1 v1@51.35,67.875 ; v1(51.35,67.85) v1@51.35,67.875 ; R11.2 v1@51.35,67.875
  Bottom Layer, Bottom w0.5: v1(38.35,67.6) 51.1,67.6 v1(51.35,67.85)
R122: R12.2 R13.1 | length 2.9
  Top Layer, Top w0.5: R12.2 52.125,46.125 53.075,47.075 R13.1
R172: R17.2 R18.1 | length 3.1
  Top Layer, Top w0.5: R17.2 54.075,45.575 55.575,47.075 R18.1
R331: DA8.5 R33.1 R36.1 | length 6.7
  Top Layer, Top w0.5: R36.1 37.1,13.575 DA8.5 37.1,10.6 37.35,10.35 40.325,10.35 R33.1
R341: DA7.5 R34.1 R35.1 | length 7.9
  Top Layer, Top w0.5: R35.1 1.625,20.1 DA7.5 5.6,20.1 6.1,20.6 6.1,21.85 5.575,22.375 R34.1
RX+: X3.3 X4.5 | length 48.7
  Top Layer, Top w0.5: X4.5 14.1,45.1 14.1,48.6 15.6,50.1 19.1,50.1 23.6,54.6 23.6,61.6 25.1,63.1 25.1,71.6 26.1,72.6 29.1,72.6 31.3,74.8 31.3,76.84 X3.3
RX-: X3.4 X4.6 | length 51.6
  Top Layer, Top w0.5: X4.6 15.1,41.1 15.1,48.1 16.1,49.1 19.6,49.1 25.1,54.6 25.1,61.6 26.35,62.85 26.35,71.1 26.85,71.6 30.6,71.6 32.56,73.56 X3.4
TX+: X3.5 X4.3 | length 38.5
  Top Layer, Top w0.5: X4.3 15.1,56.1 15.1,71.1 20.85,76.85 28.77,76.85 X3.5
TX-: X3.6 X4.4 | length 39.8
  Top Layer, Top w0.5: X4.4 15.1,51.1 18.6,51.1 22.1,54.6 22.1,61.6 24.1,63.6 24.1,72.1 25.6,73.6 28.06,73.6 X3.6
U+: C49.1 R23.2 X1.4 | length 9.1
  Top Layer, Top w0.5: R23.2 C49.1 52.35,69.85 52.6,70.1 52.6,74.1 X1.4
U-: C50.1 R25.2 X1.5 | length 8.7
  Top Layer, Top w0.5: X1.5 50.25,76.83 50.25,74.2 49.625,73.575 R25.2 C50.1
UM+: DA1.13 R23.1 | length 13.4
  Top Layer, Top w0.25: DA1.13 44.85,58.35 45.35,58.85
  Top Layer, Top w0.5: 45.35,58.85 46.85,60.35 46.85,66.85 47.6,67.6 47.6,69.825 R23.1
UM-: DA1.12 R25.1 | length 17.4
  Top Layer, Top w0.25: DA1.12 46.35,56.85 46.85,57.35
  Top Layer, Top w0.5: 46.85,57.35 47.6,58.1 47.6,66.6 48.6,67.6 48.6,71.075 R25.1
X21: R6.1 R9.1 X2.1 | length 8.1
  Top Layer, Top w0.5: R6.1 R9.1 62.85,17.85 X2.1
X22: C7.1 C58.1 DA2.2 DA12.3 R44.1 X2.2 | length 27
  Top Layer, Top w0.5: DA12.3 DA2.2 51.735,20.235 52.35,20.85 52.35,25.6 ; C7.1 52.35,25.6 ; X2.2 64.1,22.6 58.85,22.6 57.85,23.6 57.85,23.85 56.1,25.6 C58.1 R44.1 52.35,25.6
X24: C27.1 R42.2 X2.4 | length 22.1
  Top Layer, Top w0.5: C27.1 51.375,30.1 59.1,30.1 ; R42.2 59.1,24.1 59.1,30.1 ; X2.4 64.6,30.1 59.1,30.1
X25: C28.1 R43.1 X2.5 | length 6.7
  Top Layer, Top w0.5: C28.1 C28.1@60.1,34.1 ; R43.1 C28.1@60.1,34.1 ; X2.5 C28.1@60.1,34.1
X27: R29.2 R43.2 X2.7 | length 17.5
  Top Layer, Top w0.5: R43.2 60.1,37.1 61.1,37.1 X2.7 66.6,41.1 68.1,42.6 R29.2
pads on no net: DA1.14 DA1.20 DA4.3 DA4.5 DA6.3 DA6.5 DA6.8 DA7.3 DA8.3 DA10.3 DA10.5 DA10.8 DA11.3 DA11.5 DA11.8 DA12.1 DA12.5 DA12.8
copper on no net: | length 0.2
  Top Layer, Top w0.5: 64.85,37.6 65.1,37.6

## Polygon pours and split planes (outlines as drawn)
GND on Bottom Layer, Bottom "Bottom Layer, Bottom-GND" (solid, pour order 0): 9.6,73.1 6.6,70.1 1.1,70.1 1.1,9.6 6.6,9.6 9.6,6.6 9.6,1.1 56.1,1.1 56.1,6.1 59.6,9.6 69.1,9.6 69.1,70.6 63.1,70.6 60.6,73.1 60.6,79.1 9.6,79.1

## Keep-outs
Keep-Out Layer, Board:
  the board outline again, w0.15

## Other copper
Top Layer, Top:
  text "KПБT.468739.004" at 41.387,3.351 h0.94
  text "00" at 49.913,1.101 h0.94
  text "1" at 53.333,1.101 h0.94
  text "KПБT.758724.006" at 34.287,1.031 h0.94
Bottom Layer, Bottom:
  text "00" at 52.037,1.101 h0.94
  text "2" at 56.028,1.101 h0.94
  text "KПБT.758724.006" at 48.713,1.031 h0.94

## Silkscreen, mask and mechanical layers (free items; w line width, h text height)
Top Overlay, Top Silk:
  lines w0.15: 44.85,38.35 44.85,35.35 37.6,35.35 37.6,38.35 56.35,38.35 56.35,43.35 48.35,43.35 48.35,38.35 ; 45.35,50.35 47.85,50.35 ; 47.35,50.35 47.35,48.1 47.85,47.6 ; 47.85,52.1 48.35,51.35 48.35,50.1 ; 52.6,46.35 52.85,45.85 59.6,45.85 59.6,47.6 ; 54.35,70.35 55.6,72.35 58.35,72.35 ; 55.35,46.35 55.6,45.85 ; 59.1,49.6 59.85,47.85 ; 46.35,27.1 46.35,30.1 49.1,30.1 49.1,32.1 54.1,32.1 54.1,28.35 54.85,26.85 54.85,22.6 47.1,22.6 47.1,25.6 46.35,27.1
  text "GND" at 15.824,77.101 h0.94
  text "1" at 36.333,77.101 h0.94
  text "1" at 58.333,76.851 h0.94
  text "EX_GND" at 15.663,74.601 h0.94
  text "1" at 13.333,62.601 h0.94
  text "TX+" at 5.824,51.101 h0.94
  text "TX-" at 5.824,46.101 h0.94
  text "RX+" at 5.744,41.101 h0.94
  text "RX-" at 5.744,36.101 h0.94
  text "1" at 63.833,15.601 h0.94
Top Solder, Top Mask:
  the board outline again, w1
Bottom Solder, Bot Mask:
  the board outline again, w1

## Text inside footprints (layer, text, board x,y; h text height)
C1: Top Overlay, Top Silk "+" at 11.85,25.35 h0.94 r270
C2: Top Overlay, Top Silk "+" at 48.35,56.6 h0.94
C9: Top Overlay, Top Silk "+" at 39.85,63.1 h0.94 r180
C12: Top Overlay, Top Silk "+" at 47.1,66.6 h0.94 r180
C13: Top Overlay, Top Silk "+" at 47.35,59.1 h0.94
C17: Top Overlay, Top Silk "+" at 42.6,33.1 h0.94
C20: Top Overlay, Top Silk "+" at 58.85,52.6 h0.94 r90
C21: Top Overlay, Top Silk "+" at 35.1,28.85 h0.94
C30: Top Overlay, Top Silk "+" at 45.1,10.1 h0.94 r90
C33: Top Overlay, Top Silk "+" at 24.315,39.718 h0.94 r180
C35: Top Overlay, Top Silk "+" at 58.85,58.35 h0.94 r90
C36: Top Overlay, Top Silk "+" at 41.35,44.1 h0.94
C38: Top Overlay, Top Silk "+" at 14.1,4.1 h0.94
C42: Top Overlay, Top Silk "+" at 4.1,18.35 h0.94 r270
C43: Top Overlay, Top Silk "+" at 35.6,5.85 h0.94 r180
C53: Top Overlay, Top Silk "+" at 56.85,43.6 h0.94
C54: Top Overlay, Top Silk "+" at 55.35,26.6 h0.94
C55: Top Overlay, Top Silk "+" at 32.6,55.85 h0.94
C56: Top Overlay, Top Silk "+" at 41.35,29.1 h0.94
C57: Top Overlay, Top Silk "+" at 41.1,67.6 h1.25 r90